# Altium PCB TK502_Frontpanel_LEDs.PcbDoc
Units mm, origin at the board's own origin, x right, y up, seen from the top; angles counter-clockwise.
Board outline 51 x 125 mm, 2 copper layers (Top Layer, Bottom Layer); 55 components, 56 nets, 150 pads, 142 vias.
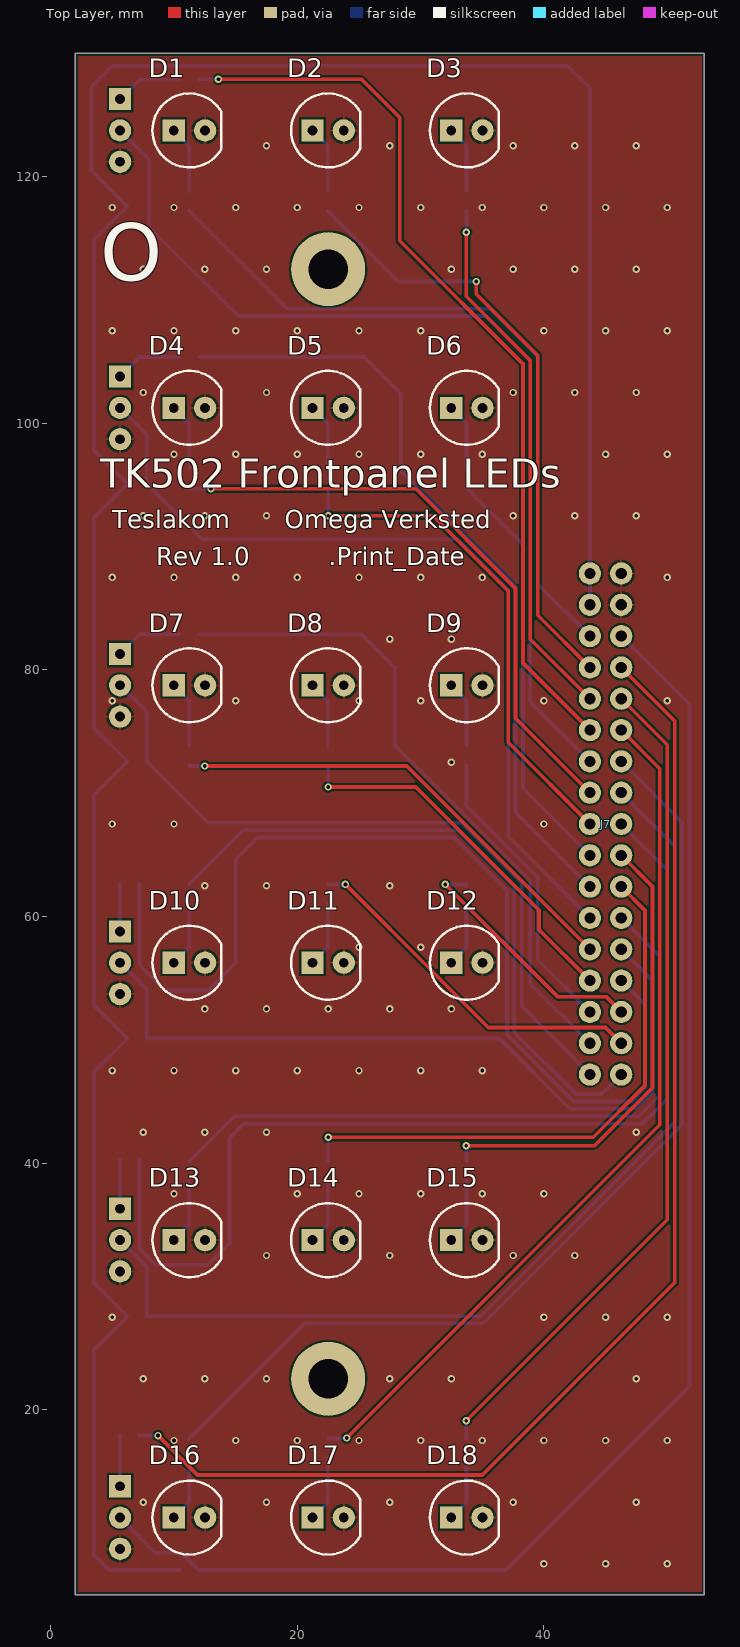
[diagram p0: Top Layer view]
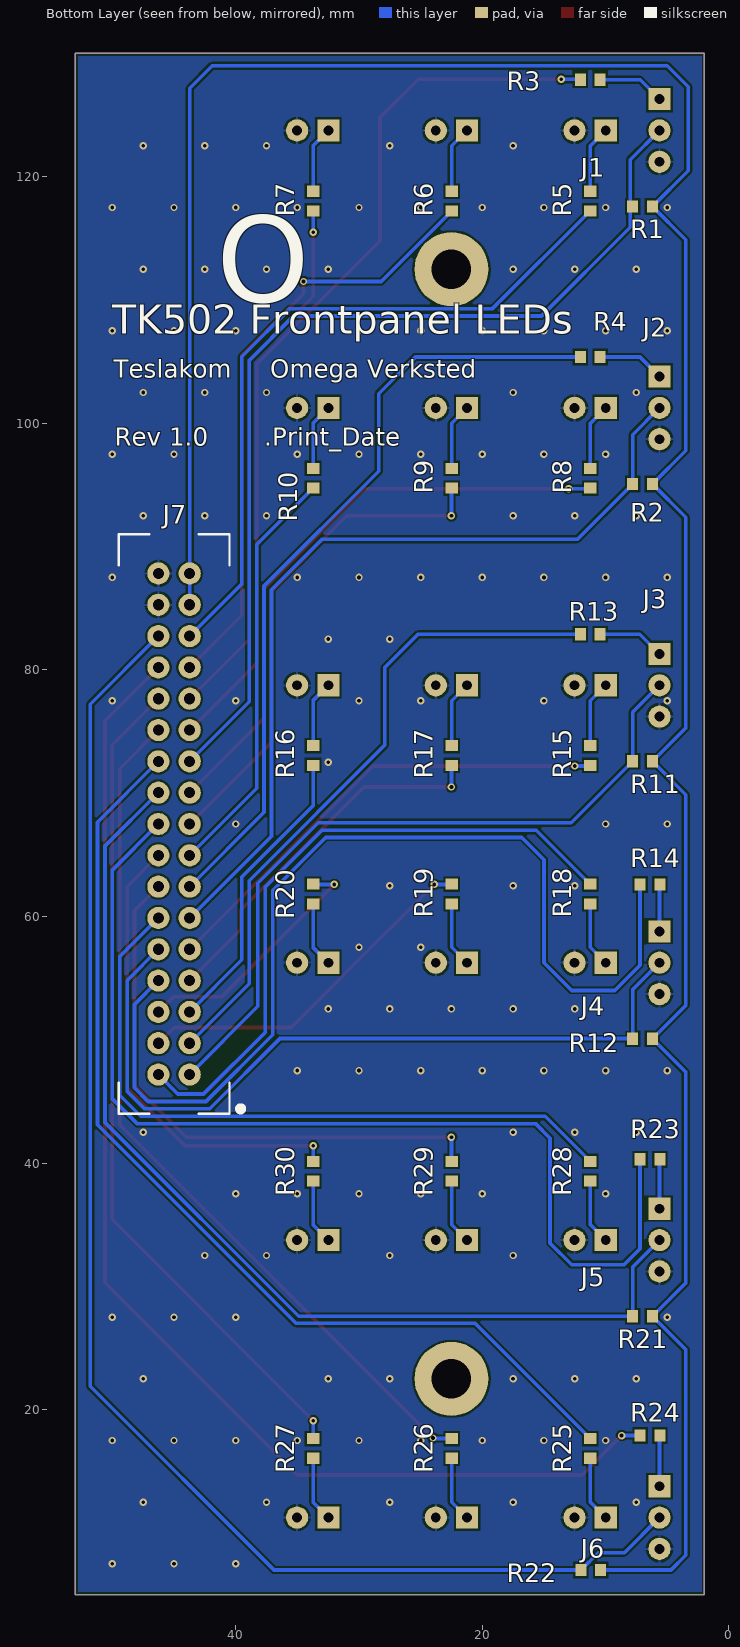
[diagram p1: Bottom Layer view, seen from below]
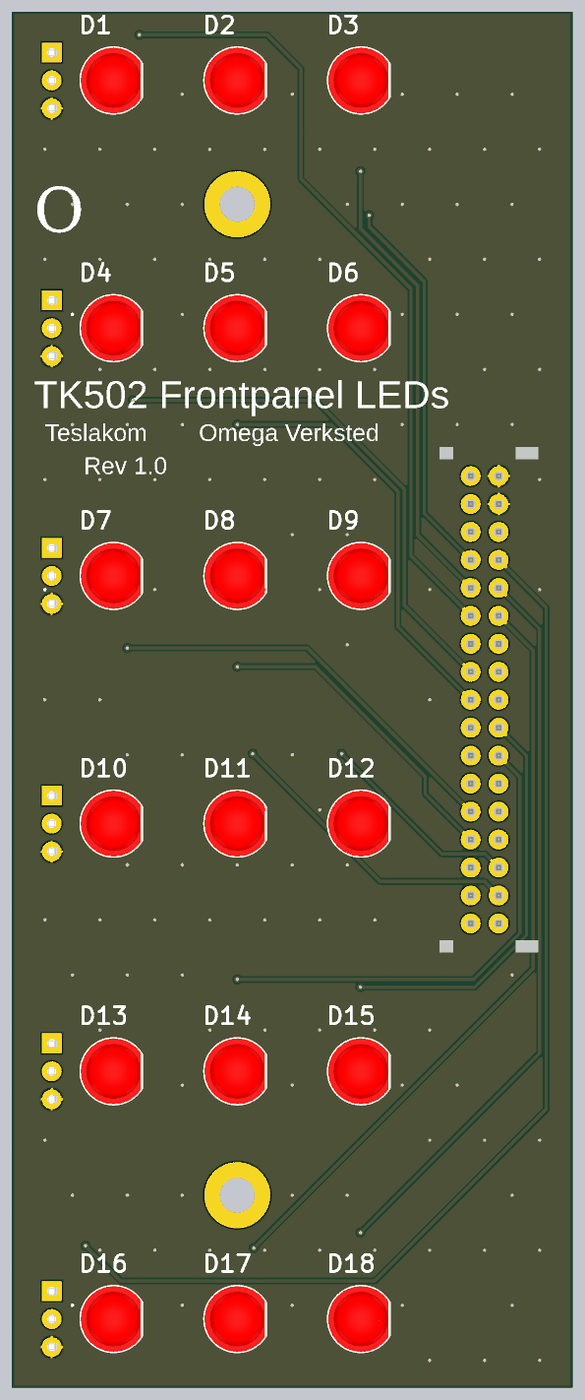
[diagram p2: 3D render of the assembled board from above, using the file's embedded part models]

## Layer stack, top to bottom
Top Solder: solder mask 0.0102, Solder Resist, Dk 3.5
Top Layer: signal copper 0.0356
Dielectric 1: dielectric 0.32, FR-4, Dk 4.8
Bottom Layer: signal copper 0.0356
Bottom Solder: solder mask 0.0102, Solder Resist, Dk 3.5

## Board outline
2,5 2,130 53,130 53,5

## Design rules (kind name [scope] priority, off if disabled: settings)
Clearance [All] p1: gap=0.16 ignorepadtopadclearanceinfootprint=FALSE except(0: Arc-Text Arc-Hole Track-Text Track-Hole SMDPad-Text SMDPad-Hole THPad-Text THPad-Hole Via-Text Via-Hole Fill-Text Fill-Hole Poly-Text Poly-Hole Region-Text Region-Hole Text-Text Text-Hole)
DiffPairsRouting [All] p1: maxlimit=0.254 minlimit=0.254 mostfreqgap=0.254 substack1={ED5D0EFF-A996-426F-9EDD-C7155F090AA5} toplayer_{ed5d0eff-a996-426f-9edd-c7155f090aa5}_minwidth=0.381 toplayer_{ed5d0eff-a996-426f-9edd-c7155f090aa5}_maxwidth=0.381 toplayer_{ed5d0eff-a996-426f-9edd-c7155f090aa5}_prefwidth=0.381 bottomlayer_{ed5d0eff-a996-426f-9edd-c7155f090aa5}_minwidth=0.381 bottomlayer_{ed5d0eff-a996-426f-9edd-c7155f090aa5}_maxwidth=0.381 bottomlayer_{ed5d0eff-a996-426f-9edd-c7155f090aa5}_prefwidth=0.381 toplayer_minwidth=0.381 toplayer_maxwidth=0.381 toplayer_prefwidth=0.381 bottomlayer_minwidth=0.381 bottomlayer_maxwidth=0.381 bottomlayer_prefwidth=0.381 substack2={1EF112EB-C8B9-4509-891F-EA84DB100F4E} toplayer_{1ef112eb-c8b9-4509-891f-ea84db100f4e}_minwidth=0.381 toplayer_{1ef112eb-c8b9-4509-891f-ea84db100f4e}_maxwidth=0.381 toplayer_{1ef112eb-c8b9-4509-891f-ea84db100f4e}_prefwidth=0.381 bottomlayer_{1ef112eb-c8b9-4509-891f-ea84db100f4e}_minwidth=0.381 bottomlayer_{1ef112eb-c8b9-4509-891f-ea84db100f4e}_maxwidth=0.381 bottomlayer_{1ef112eb-c8b9-4509-891f-ea84db100f4e}_prefwidth=0.381 maxuncoupledlength=12.7
Height [All] p1: minheight=0 maxheight=200 prefheight=12.7
HoleSize [All] p1: absolutevalues=TRUE maxlimit=6.35 minlimit=0.3 maxpercent=80.000 minpercent=20.000
MinimumSolderMaskSliver [All] p1: minsoldermaskwidth=0.1
PlaneClearance [All] p1: clearance=1
PlaneConnect [All] p1: planeconnectstyle=Relief reliefexpansion=0.508 reliefentries=4 reliefconductorwidth=1 reliefairgap=0.254
PolygonConnect PolygonConnect_1 [IsVia] p1: connectstyle=Direct reliefconductorwidth=0.254 reliefentries=4 polygonreliefangle="90 Angle" airgapwidth=0.254
PolygonConnect [All] p2: connectstyle=Relief reliefconductorwidth=0.2 reliefentries=4 polygonreliefangle="90 Angle" airgapwidth=0.2
RoutingVias [All] p1: holewidth=0.3 width=0.6 viastyle="Through Hole" minholewidth=0.3 minwidth=0.6 maxholewidth=6.35 maxwidth=10
SilkToSolderMaskClearance [IsPad] p1: minsilkscreentomaskgap=0.178 clearancetoexposedcopper=TRUE
SolderMaskExpansion [All] p1: expansion=0.102 istentingtop=FALSE
Width [All] p1: maxlimit=10 minlimit=0.16 preferedwidth=0.4 substack1={ED5D0EFF-A996-426F-9EDD-C7155F090AA5} substack2={1EF112EB-C8B9-4509-891F-EA84DB100F4E}
23 further rules are at their usual default settings.

## Components (designator, comment, footprint, x,y, rotation, side; value= is the part's Value field where it differs from the comment)
D1 "Grønn LED 5mm" LED254W7L870D500 11.25,123.75 r0 top locked
D2 "Rød LED 5mm" LED254W7L870D500 22.5,123.75 r0 top locked
D3 "Grønn LED 5mm" LED254W7L870D500 33.75,123.75 r0 top locked
D4 "Grønn LED 5mm" LED254W7L870D500 11.25,101.25 r0 top locked
D5 "Rød LED 5mm" LED254W7L870D500 22.5,101.25 r0 top locked
D6 "Grønn LED 5mm" LED254W7L870D500 33.75,101.25 r0 top locked
D7 "Grønn LED 5mm" LED254W7L870D500 11.25,78.75 r0 top locked
D8 "Rød LED 5mm" LED254W7L870D500 22.5,78.75 r0 top locked
D9 "Grønn LED 5mm" LED254W7L870D500 33.75,78.75 r0 top locked
D10 "Grønn LED 5mm" LED254W7L870D500 11.25,56.25 r0 top locked
D11 "Rød LED 5mm" LED254W7L870D500 22.5,56.25 r0 top locked
D12 "Grønn LED 5mm" LED254W7L870D500 33.75,56.25 r0 top locked
D13 "Grønn LED 5mm" LED254W7L870D500 11.25,33.75 r0 top locked
D14 "Rød LED 5mm" LED254W7L870D500 22.5,33.75 r0 top locked
D15 "Grønn LED 5mm" LED254W7L870D500 33.75,33.75 r0 top locked
D16 "Grønn LED 5mm" LED254W7L870D500 11.25,11.25 r0 top locked
D17 "Rød LED 5mm" LED254W7L870D500 22.5,11.25 r0 top locked
D18 "Grønn LED 5mm" LED254W7L870D500 33.75,11.25 r0 top locked
J1 "B3B-XH-A (LF)(SN)" JST_3P 5.625,123.75 r0 bottom
J2 "B3B-XH-A (LF)(SN)" JST_3P 5.625,101.25 r0 bottom
J3 "B3B-XH-A (LF)(SN)" JST_3P 5.625,78.75 r0 bottom
J4 "B3B-XH-A (LF)(SN)" JST_3P 5.625,56.25 r0 bottom
J5 "B3B-XH-A (LF)(SN)" JST_3P 5.625,33.75 r0 bottom
J6 "B3B-XH-A (LF)(SN)" JST_3P 5.625,11.25 r0 bottom
J7 "2X17PConnector" HDRV34W64P254_2X17_5070X900X900B 45,67.5 r0 top
R1 "10k" RESC0603(1608)_N 7,117.581 r180 bottom
R2 "10k" RESC0603(1608)_N 7,95.081 r180 bottom
R3 "0R" RESC0603(1608)_N 11.24,127.855 r180 bottom
R4 "0R" RESC0603(1608)_N 11.24,105.375 r180 bottom
R5 "330R" RESC0603(1608)_N 11.24,118.02 r270 bottom
R6 "330R" RESC0603(1608)_N 22.48,118.02 r270 bottom
R7 "330R" RESC0603(1608)_N 33.72,118.02 r270 bottom
R8 "330R" RESC0603(1608)_N 11.24,95.54 r270 bottom
R9 "330R" RESC0603(1608)_N 22.48,95.54 r270 bottom
R10 "330R" RESC0603(1608)_N 33.72,95.54 r270 bottom
R11 "10k" RESC0603(1608)_N 7,72.581 r180 bottom
R12 "10k" RESC0603(1608)_N 7,50.081 r180 bottom
R13 "0R" RESC0603(1608)_N 11.24,82.895 r180 bottom
R14 "0R" RESC0603(1608)_N 6.4,62.6 r180 bottom
R15 "330R" RESC0603(1608)_N 11.24,73.06 r270 bottom
R16 "330R" RESC0603(1608)_N 33.72,73.06 r270 bottom
R17 "330R" RESC0603(1608)_N 22.48,73.06 r270 bottom
R18 "330R" RESC0603(1608)_N 11.24,61.82 r90 bottom
R19 "330R" RESC0603(1608)_N 22.48,61.82 r90 bottom
R20 "330R" RESC0603(1608)_N 33.72,61.82 r90 bottom
R21 "10k" RESC0603(1608)_N 7,27.581 r180 bottom
R22 "10k" RESC0603(1608)_N 11.2,7 r180 bottom
R23 "0R" RESC0603(1608)_N 6.4,40.3 r180 bottom
R24 "0R" RESC0603(1608)_N 6.4,17.9 r180 bottom
R25 "330R" RESC0603(1608)_N 11.24,16.86 r90 bottom
R26 "330R" RESC0603(1608)_N 22.48,16.86 r90 bottom
R27 "330R" RESC0603(1608)_N 33.72,16.86 r90 bottom
R28 "330R" RESC0603(1608)_N 11.24,39.34 r90 bottom
R29 "330R" RESC0603(1608)_N 22.48,39.34 r90 bottom
R30 "330R" RESC0603(1608)_N 33.72,39.34 r90 bottom

## Footprints (in the part's own frame and the unit in brackets; to place one, negate y for a bottom-side part, rotate by r counter-clockwise, add the part's x,y. Pads: shape width x height; smd on the part's side, far side on the other; paste and mask are expansions set on the pad)
HDRV34W64P254_2X17_5070X900X900B [mm] "IDE-connector"
  round 1.8 hole 0.9: 1(-1.27,-20.32) 2(1.27,-20.32) 3(-1.27,-17.78) 4(1.27,-17.78) 5(-1.27,-15.24) 6(1.27,-15.24) 7(-1.27,-12.7) 8(1.27,-12.7) 9(-1.27,-10.16) 10(1.27,-10.16) 11(-1.27,-7.62) 12(1.27,-7.62) 13(-1.27,-5.08) 14(1.27,-5.08) 15(-1.27,-2.54) 16(1.27,-2.54) 17(-1.27,0) 18(1.27,0) 19(-1.27,2.54) 20(1.27,2.54) 21(-1.27,5.08) 22(1.27,5.08) 23(-1.27,7.62) 24(1.27,7.62) 25(-1.27,10.16) 26(1.27,10.16) 27(-1.27,12.7) 28(1.27,12.7) 29(-1.27,15.24) 30(1.27,15.24) 31(-1.27,17.78) 32(1.27,17.78) 33(-1.27,20.32) 34(1.27,20.32)
  body extent -4.87,-22.95 4.88,22.95, height 10.45
JST_3P [mm]
  rect 1.8x1.8 hole 0.8: 1(0,-2.54)
  round 1.8 hole 0.8: 2(0,0) 3(0,2.54)
  body extent -2.35,-4.95 3.4,4.95, height 7
LED254W7L870D500 [mm] "5mm LED, 8.7mm høy, 2.54mm pitch"
  rect 1.8x1.8 hole 0.8: 1(-1.27,0)
  round 1.8 hole 0.8: 2(1.27,0)
  silkscreen extent -3,-3 2.6,3, body extent -3,-3 2.5,3, height 8.9
RESC0603(1608)_N [mm] "Chip Resistor, Body 1.6x0.8mm, IPC Medium Density"
  rect 0.9x1 smd: 1(-0.8,0) 2(0.8,0)
  body extent -0.85,-0.47 0.85,0.47, height 0.6

## Part data
D1 D3 D4 D6 D7 D9 D10 D12 D13 D15 D16 D18: library part 5138, "LED, Green, 5mm, 572 nm, 2.1 V, 20 mA, 150 mcd", id=5138, komponenttype=9, leverandor=Farnell, leverandor_varenr=2112108, navn="Grønn LED 5mm", nokkelord="diode, led, lys, green", pakke_opprettet="09/02/2016 18:21:00", pakke_opprettet_av=1366, pakketype=TH, pris=3, produsent=Multicomp, symbol_opprettet="06/07/2014 18:59:47", symbol_opprettet_av=815
D2 D5 D8 D11 D14 D17: library part 5305, "LED, Red, 5mm, 643 nm, 1.8 V, 20 mA, 400 mcd", antall=154, dybde=3, hylle=4, id=5305, komponenttype=9, lager_type=Fremlager, leverandor=Farnell, leverandor_varenr=2112111, navn="Rød LED 5mm", pakke_opprettet="09/02/2016 18:21:00", pakke_opprettet_av=1366, pakketype=TH, pris=3, produsent=Multicomp, rad=6, rom=OV, symbol_opprettet="06/07/2014 18:59:47", symbol_opprettet_av=815
J1 J2 J3 J4 J5 J6: library part 4473, "JST 3pin (pris pr. stk.)", antall=100, dybde=0, hylle=6, id=4473, komponenttype=11, lager_type=Fremlager, leverandor=Farnell, leverandor_varenr=1516277, navn="B3B-XH-A (LF)(SN)", nokkelord="Connector, Kontakt", pakke_opprettet="28/06/2014 18:25:12", pakke_opprettet_av=815, pakketype=TH, pris=2, produsent=JST, rad=3, rom=OV, symbol_opprettet="28/06/2014 15:33:24", symbol_opprettet_av=815
J7: library part 3259, "Header", id=3259, komponenttype=11, leverandor=Farnell, leverandor_varenr=2215313, navn="Header 2X17 Shrouded", nokkelord=IDE, pakke_opprettet="12/07/2014 17:05:20", pakke_opprettet_av=815, pakketype=TH, pris=10, produsent=Amphenol, symbol_opprettet="12/07/2014 17:03:56", symbol_opprettet_av=815
R1 R2 R11 R12 R21 R22: library part 5264, "0.1W 1% Thick film resistor", antall=4, dybde=72, hylle=2, id=5264, komponenttype=1, lager_type=Fremlager, leverandor=Farnell, leverandor_varenr=2447230, navn=10k, nokkelord="Resistor Motstand", pakke_opprettet="08/07/2014 21:15:30", pakke_opprettet_av=815, pakketype=0603, pris=0, produsent=Multicomp, rad=0, rom=OV, symbol_opprettet="08/07/2014 21:16:33", symbol_opprettet_av=815
R3 R4 R13 R14 R23 R24: library part 3646, "0.1W 1% Thick film resistor, Jumper", antall=450, dybde=0, hylle=2, id=3646, komponenttype=1, lager_type=Fremlager, leverandor=Farnell, leverandor_varenr=2447060, navn=0R, nokkelord="smd, 0603, motstand", pakke_opprettet="08/07/2014 21:15:30", pakke_opprettet_av=815, pakketype=0603, pris=0, produsent=multicomp, rad=-1, rom=OV, symbol_opprettet="08/07/2014 21:16:33", symbol_opprettet_av=815
R5 R6 R7 R8 R9 R10 R15 R16 R17 R18 R19 R20 R25 R26 R27 R28 R29 R30: library part 5343, "0.1W 1% Thick film resistor", antall=45, dybde=36, hylle=2, id=5343, komponenttype=1, lager_type=Fremlager, leverandor=Farnell, leverandor_varenr=2447339, navn=330R, nokkelord="Resistor Motstand", pakke_opprettet="08/07/2014 21:15:30", pakke_opprettet_av=815, pakketype=0603, pris=0, produsent=Multicomp, rad=0, rom=OV, symbol_opprettet="08/07/2014 21:16:33", symbol_opprettet_av=815

## Free pads (board coordinates)
  round 6 hole 3.2: 0(22.5,22.5) 0(22.5,112.5)

## Via types
v1: diameter 0.6, hole 0.3, Top Layer to Bottom Layer, tented both sides, 142 vias

## Nets (pads, with @x,y where several pads share a name; then routed paths per layer and width w, separated by ;. In a path a pad name is that pad's centre, name@x,y a point inside that pad or via, vN(x,y) a via of type N, cw(c..) or ccw(c..) an arc to the next point about the centre after c; other vN are vias at no path point)
0_FE: J7.27 R6.2 | length 49.5
  Top Layer w0.3: v1(34.5,111.5) 34.5,110.5 39.5,105.5 39.5,84.43 J7.27
  Bottom Layer w0.3: R6.2 28.2,111.5 v1(34.5,111.5)
0_INT: J7.23 R3.1 | length 73.6
  Top Layer w0.3: v1(13.6,127.9) 25.2,127.9 28.3,124.8 28.3,114.8 38.3,104.8 38.3,80.55 J7.23
  Bottom Layer w0.3: R3.1 12.085,127.9 v1(13.6,127.9)
0_KI: J7.29 R5.2 | length 57.6
  Bottom Layer w0.3: R5.2 19.16,109.3 35.6,109.3 39.5,105.4 39.5,86.97 J7.29
0_KNP: J1.2 J7.21 R1.1 | length 78.7
  Bottom Layer w0.3: J1.2 8,121.375 8,115.9 15.2,108.7 35.3,108.7 38.9,105.1 38.9,77.41 J7.21
0_ST: J7.25 R7.2 | length 43.7
  Top Layer w0.3: v1(33.7,115.5) 33.7,110.3 38.9,105.1 38.9,82.49 J7.25
  Bottom Layer w0.3: v1(33.7,115.5) 33.72,115.52 R7.2
1_FE: J7.17 R9.2 | length 41
  Top Layer w0.3: v1(22.5,92.5) 31,92.5 37.1,86.4 37.1,74.13 J7.17
  Bottom Layer w0.3: R9.2 22.5,94.72 v1(22.5,92.5)
1_INT: J7.13 R4.1 | length 63.9
  Bottom Layer w0.3: R4.1 25.425,105.375 28.4,102.4 28.4,96.1 37.7,86.8 37.7,68.45 J7.13
1_KI: J7.19 R8.2 | length 48.9
  Top Layer w0.3: v1(13,94.7) 29.6,94.7 37.7,86.6 37.7,76.07 J7.19
  Bottom Layer w0.3: R8.2 11.28,94.7 v1(13,94.7)
1_KNP: J2.2 J7.11 R2.1 | length 69.3
  Bottom Layer w0.3: J2.2 7.8,99.075 R2.1 12.281,90.6 33,90.6 37.1,86.5 37.1,66.51 J7.11
1_ST: J7.15 R10.2 | length 33.9
  Bottom Layer w0.3: R10.2 38.3,90.16 38.3,70.39 J7.15
2_FE: J7.7 R17.2 | length 30.4
  Top Layer w0.3: v1(22.5,70.5) 29.6,70.5 39.6,60.5 39.6,58.93 J7.7
  Bottom Layer w0.3: R17.2 22.5,72.24 v1(22.5,70.5)
2_INT: J7.3 R13.1 | length 54
  Bottom Layer w0.3: R13.1 25.205,82.895 27.9,80.2 27.9,73.9 38.9,62.9 38.9,54.55 J7.3
2_KI: J7.9 R15.2 | length 38.7
  Top Layer w0.3: v1(12.5,72.2) 28.87,72.2 J7.9
  Bottom Layer w0.3: R15.2 11.3,72.2 v1(12.5,72.2)
2_KNP: J3.2 J7.1 R11.1 | length 59.4
  Bottom Layer w0.3: J3.2 7.8,76.575 R11.1 12.781,67.6 33.3,67.6 38.2,62.7 38.2,52.71 J7.1
2_ST: J7.5 R16.2 | length 24.1
  Bottom Layer w0.3: R16.2 33.72,68.98 39.5,63.2 39.5,56.49 J7.5
3_FE: J7.4 R19.2 | length 29.1
  Top Layer w0.3: v1(23.9,62.6) 31.27,55.23 31.27,55.222 35.492,51 44.99,51 J7.4
  Bottom Layer w0.3: R19.2 22.5,62.6 v1(23.9,62.6)
3_INT: J7.8 R14.1 | length 84.1
  Bottom Layer w0.3: R14.1 7.2,56.05 9.25,54 12.75,54 15,56.25 15,64.6 16.8,66.4 32.7,66.4 37,62.1 37,50.4 42.4,45 47.1,45 48.2,46.1 48.2,52.87 J7.8
3_KI: J7.2 R18.2 | length 53.3
  Bottom Layer w0.3: R18.2 15.62,67 33,67 37.6,62.4 37.6,50.6 42.6,45.6 44.69,45.6 J7.2
3_KNP: J4.2 J7.10 R12.1 | length 63.6
  Bottom Layer w0.3: J4.2 7.8,54.075 R12.1 7.819,50.1 36.4,50.1 42.1,44.4 47.4,44.4 48.8,45.8 48.8,54.81 J7.10
3_ST: J7.6 R20.2 | length 20.3
  Top Layer w0.3: v1(32,62.6) 41.1,53.5 45.03,53.5 J7.6
  Bottom Layer w0.3: v1(32,62.6) 33.7,62.6 R20.2
4_FE: J7.14 R29.2 | length 46.3
  Top Layer w0.3: v1(22.5,42.1) 44,42.1 48.2,46.3 48.2,60.49 J7.14
  Bottom Layer w0.3: R29.2 22.5,40.16 v1(22.5,42.1)
4_INT: J7.18 R23.1 | length 85
  Bottom Layer w0.3: R23.1 7.2,33.05 8.5,31.75 12.75,31.75 14.5,33.5 14.5,42.012 15.688,43.2 48,43.2 50,45.2 50,63.77 J7.18
4_KI: J7.12 R28.2 | length 56.1
  Bottom Layer w0.3: R28.2 14.9,43.8 47.7,43.8 49.4,45.5 49.4,56.75 J7.12
4_KNP: J5.2 J7.20 R21.1 | length 84.9
  Bottom Layer w0.3: J5.2 7.8,31.575 R21.1 34.881,27.581 50.6,43.3 50.6,65.71 J7.20
4_ST: J7.16 R30.2 | length 38.2
  Top Layer w0.3: v1(33.7,41.4) 44.1,41.4 48.8,46.1 48.8,62.43 J7.16
  Bottom Layer w0.3: v1(33.7,41.4) 33.72,41.38 R30.2
5_FE: J7.24 R26.2 | length 70.8
  Top Layer w0.3: v1(24,17.7) 49.4,43.1 49.4,71.99 J7.24
  Bottom Layer w0.3: R26.2 23.96,17.66 v1(24,17.7)
5_INT: J7.28 R24.1 | length 102.9
  Top Layer w0.3: v1(8.7,17.9) 11.9,14.7 35,14.7 50.6,30.3 50.6,75.87 J7.28
  Bottom Layer w0.3: R24.1 v1(8.7,17.9)
5_KI: J7.22 R25.2 | length 82
  Bottom Layer w0.3: R25.2 20.58,27 35.1,27 51.2,43.1 51.2,67.65 J7.22
5_KNP: J6.2 J7.30 R22.1 | length 117.2
  Bottom Layer w0.3: J6.2 8.475,8.4 10.6,8.4 R22.1 36.9,7 51.8,21.9 51.8,77.21 J7.30
5_ST: J7.26 R27.2 | length 68.3
  Top Layer w0.3: v1(33.7,19.1) 50,35.4 50,73.93 J7.26
  Bottom Layer w0.3: v1(33.7,19.1) 33.7,17.68 R27.2
GND: D1.2 D2.2 D3.2 D4.2 D5.2 D6.2 D7.2 D8.2 D9.2 D10.2 D11.2 D12.2 D13.2 D14.2 D15.2 D16.2 D17.2 D18.2 J1.3 J2.3 J3.3 J4.3 J5.3 J6.3 J7.32 J7.34
  other v1: 40,7.5 45,7.5 50,7.5 7.5,12.5 17.5,12.5 27.5,12.5 37.5,12.5 47.5,12.5 10,17.5 15,17.5 20,17.5 25,17.5 30,17.5 35,17.5 40,17.5 45,17.5 50,17.5 7.5,22.5 12.5,22.5 17.5,22.5 27.5,22.5 32.5,22.5 47.5,22.5 5,27.5 40,27.5 45,27.5 50,27.5 17.5,32.5 27.5,32.5 37.5,32.5 42.5,32.5 10,37.5 20,37.5 25,37.5 30,37.5 35,37.5 40,37.5 7.5,42.5 12.5,42.5 17.5,42.5 47.5,42.5 5,47.5 10,47.5 15,47.5 20,47.5 25,47.5 30,47.5 35,47.5 12.5,52.5 17.5,52.5 22.5,52.5 27.5,52.5 32.5,52.5 25,57.5 30,57.5 12.5,62.5 17.5,62.5 27.5,62.5 5,67.5 10,67.5 40,67.5 32.5,72.5 5,77.5 15,77.5 25,77.5 30,77.5 40,77.5 50,77.5 27.5,82.5 32.5,82.5 5,87.5 10,87.5 15,87.5 20,87.5 25,87.5 30,87.5 35,87.5 50,87.5 7.5,92.5 12.5,92.5 17.5,92.5 37.5,92.5 42.5,92.5 47.5,92.5 10,97.5 15,97.5 20,97.5 25,97.5 30,97.5 35,97.5 45,97.5 50,97.5 7.5,102.5 17.5,102.5 37.5,102.5 42.5,102.5 47.5,102.5 5,107.5 10,107.5 15,107.5 20,107.5 25,107.5 30,107.5 40,107.5 45,107.5 50,107.5 7.5,112.5 12.5,112.5 17.5,112.5 32.5,112.5 37.5,112.5 42.5,112.5 47.5,112.5 5,117.5 10,117.5 15,117.5 20,117.5 25,117.5 30,117.5 35,117.5 40,117.5 45,117.5 50,117.5 17.5,122.5 27.5,122.5 37.5,122.5 42.5,122.5 47.5,122.5
NetD1_1: D1.1 R5.1 | length 5.5
  Bottom Layer w0.3: D1.1 11.24,122.49 R5.1
NetD2_1: D2.1 R6.1 | length 5.4
  Bottom Layer w0.3: D2.1 22.48,122.5 R6.1
NetD3_1: D3.1 R7.1 | length 5.4
  Bottom Layer w0.3: D3.1 33.72,122.51 R7.1
NetD4_1: D4.1 R8.1 | length 5.4
  Bottom Layer w0.3: D4.1 11.24,99.99 R8.1
NetD5_1: D5.1 R9.1 | length 5.4
  Bottom Layer w0.3: D5.1 22.48,100 R9.1
NetD6_1: D6.1 R10.1 | length 5.4
  Bottom Layer w0.3: D6.1 33.72,100.01 R10.1
NetD7_1: D7.1 R15.1 | length 5.4
  Bottom Layer w0.3: D7.1 11.24,77.49 R15.1
NetD8_1: D8.1 R17.1 | length 5.4
  Bottom Layer w0.3: D8.1 22.48,77.5 R17.1
NetD9_1: D9.1 R16.1 | length 5.4
  Bottom Layer w0.3: D9.1 33.72,77.51 R16.1
NetD10_1: D10.1 R18.1 | length 5.3
  Bottom Layer w0.3: D10.1 11.24,57.51 R18.1
NetD11_1: D11.1 R19.1 | length 5.3
  Bottom Layer w0.3: D11.1 22.48,57.5 R19.1
NetD12_1: D12.1 R20.1 | length 5.3
  Bottom Layer w0.3: D12.1 33.72,57.49 R20.1
NetD13_1: D13.1 R28.1 | length 5.3
  Bottom Layer w0.3: D13.1 11.24,35.01 R28.1
NetD14_1: D14.1 R29.1 | length 5.3
  Bottom Layer w0.3: D14.1 22.48,35 R29.1
NetD15_1: D15.1 R30.1 | length 5.3
  Bottom Layer w0.3: D15.1 33.72,34.99 R30.1
NetD16_1: D16.1 R25.1 | length 5.3
  Bottom Layer w0.3: D16.1 11.24,12.51 R25.1
NetD17_1: D17.1 R26.1 | length 5.3
  Bottom Layer w0.3: D17.1 22.48,12.5 R26.1
NetD18_1: D18.1 R27.1 | length 5.3
  Bottom Layer w0.3: D18.1 33.72,12.49 R27.1
NetJ1_1: J1.1 R3.2 | length 5.5
  Bottom Layer w0.3: J1.1 7.19,127.855 R3.2
NetJ2_1: J2.1 R4.2 | length 5.5
  Bottom Layer w0.3: J2.1 7.21,105.375 R4.2
NetJ3_1: J3.1 R13.2 | length 5.5
  Bottom Layer w0.3: J3.1 7.23,82.895 R13.2
NetJ4_1: J4.1 R14.2 | length 3.8
  Bottom Layer w0.3: R14.2 5.625,62.575 J4.1
NetJ5_1: J5.1 R23.2 | length 4
  Bottom Layer w0.3: R23.2 5.625,40.275 J5.1
NetJ6_1: J6.1 R24.2 | length 4.1
  Bottom Layer w0.3: R24.2 5.625,17.875 J6.1
VCC_P5V0: J7.31 J7.33 R1.2 R2.2 R11.2 R12.2 R21.2 R22.2 | length 221.5
  Bottom Layer w0.3: R22.2 4.7,7 3.5,8.2 3.5,24.881 R21.2 3.5,30.281 3.5,47.381 R12.2 3.5,52.781 3.5,69.881 R11.2 3.5,75.281 3.5,92.381 R2.2 3.5,97.781 3.5,114.881 R1.2 3.3,120.481 3.3,127.3 5,129 41.9,129 43.73,127.17 J7.33 J7.31

## Polygon pours and split planes (outlines as drawn)
GND on Top Layer "GND_L01_P000" (solid, remove dead copper, pour order 0): 2,5 53,5 53,130 2,130
GND on Bottom Layer "GND_L02_P002" (solid, remove dead copper, pour order 2): 2,5 53,5 53,130 2,130

## Keep-outs
Keep-Out Layer:
  the board outline again, w0.1

## Silkscreen, mask and mechanical layers (free items; w line width, h text height)
Top Overlay:
  text "O" at 4,110 h8
  text "TK502 Frontpanel LEDs" at 4,94 h4
  text "Teslakom" at 5,91 h2.5
  text "Omega Verksted" at 19,91 h2.5
  text "Rev 1.0" at 8.54,88 h2.5
  text ".Print_Date" at 22.54,88 h2.5
Bottom Overlay:
  text "O" at 34,107.5 h12
  text "TK502 Frontpanel LEDs" at 50,106.5 h4
  text "Omega Verksted" at 37.2,103.2 h2.5
  text "Teslakom" at 49.9,103.2 h2.5
  text ".Print_Date" at 37.7,97.7 h2.5
  text "Rev 1.0" at 49.8,97.7 h2.5
Mechanical 1:
  the board outline again, w0.1